# Altium PCB AHRS_board.PcbDoc
Units mm, origin at the board's own origin, x right, y up, seen from the top; angles counter-clockwise.
Board outline 46.25 x 39.2 mm, 2 copper layers (Top Layer, Bottom Layer); 5 components, 7 nets, 25 pads, 0 vias.
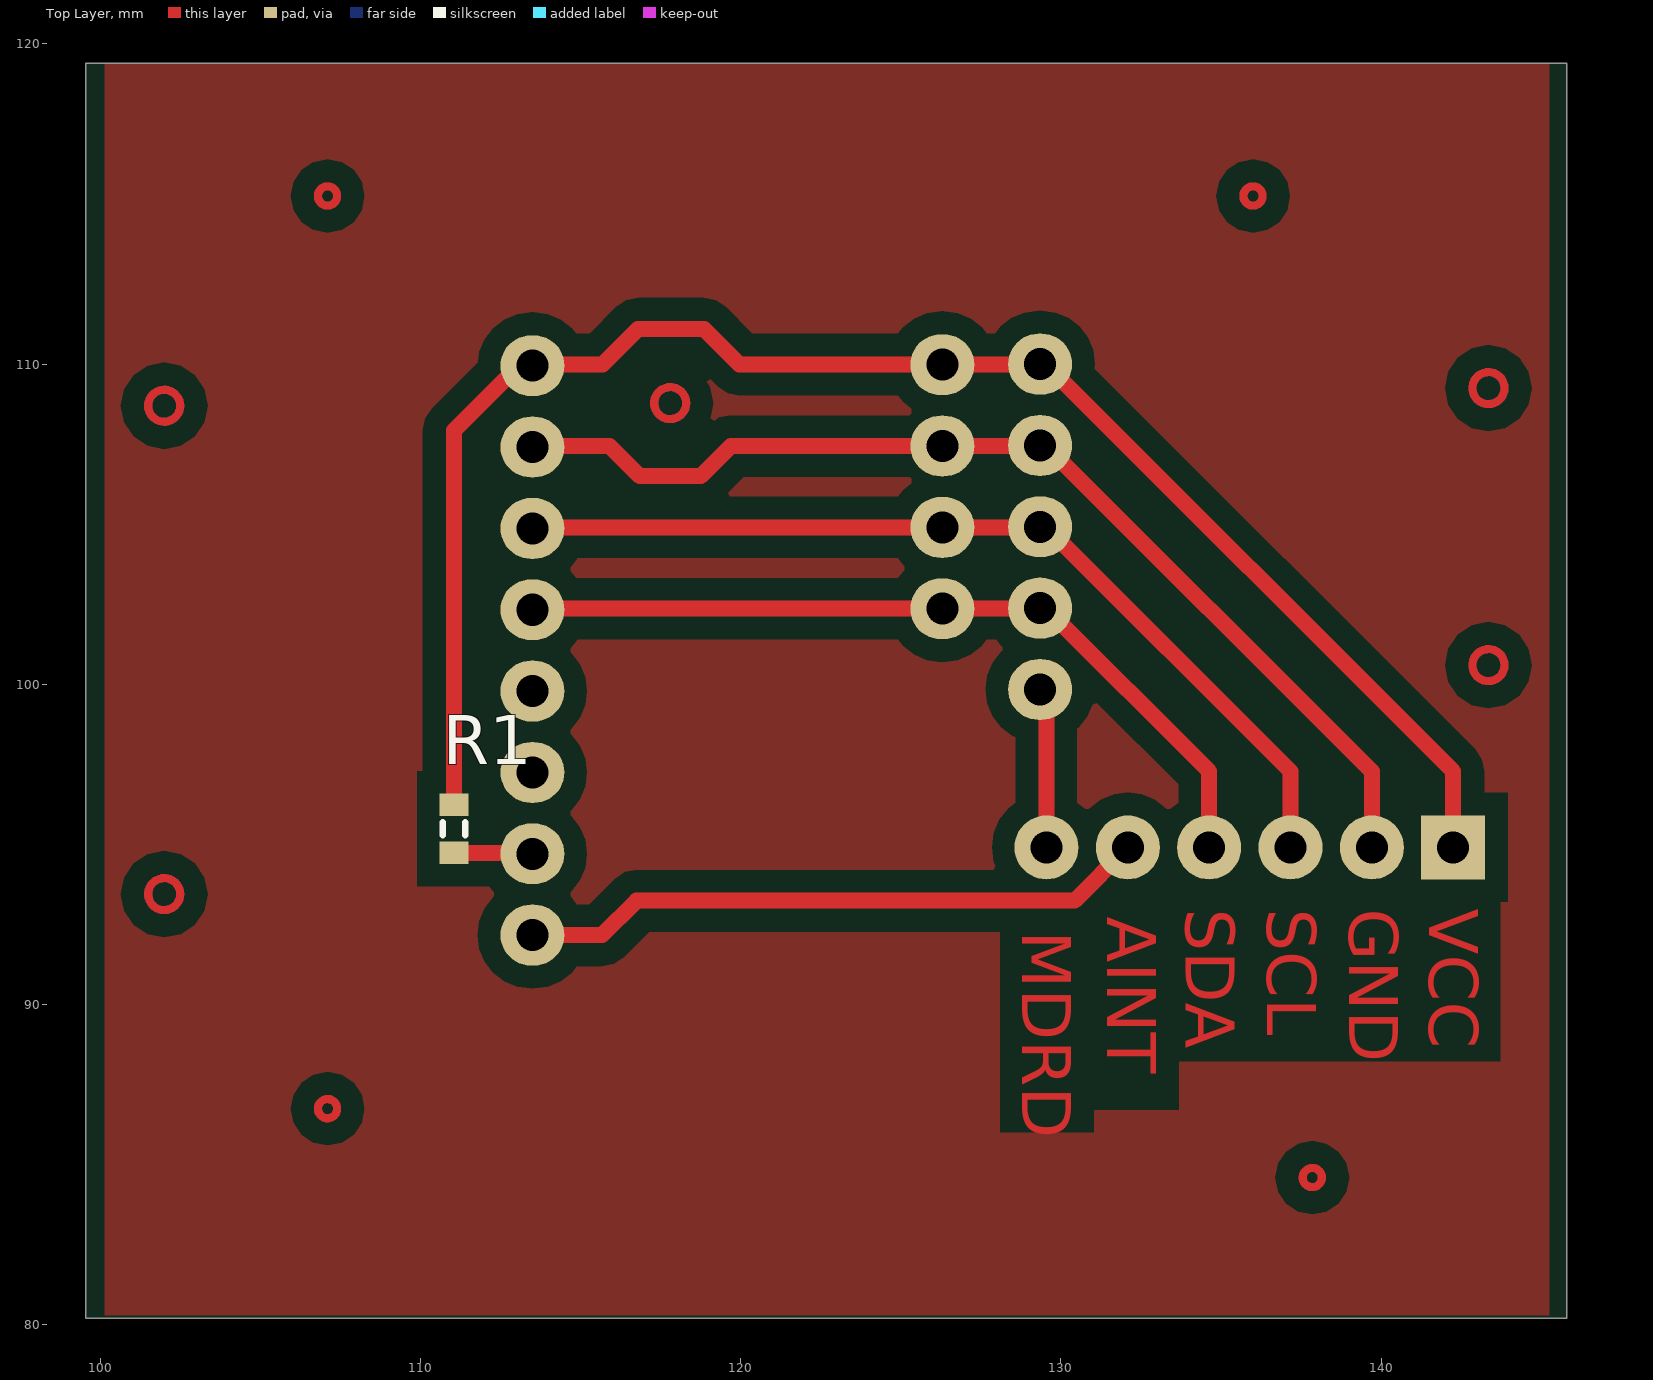
[diagram p0: Top Layer view]
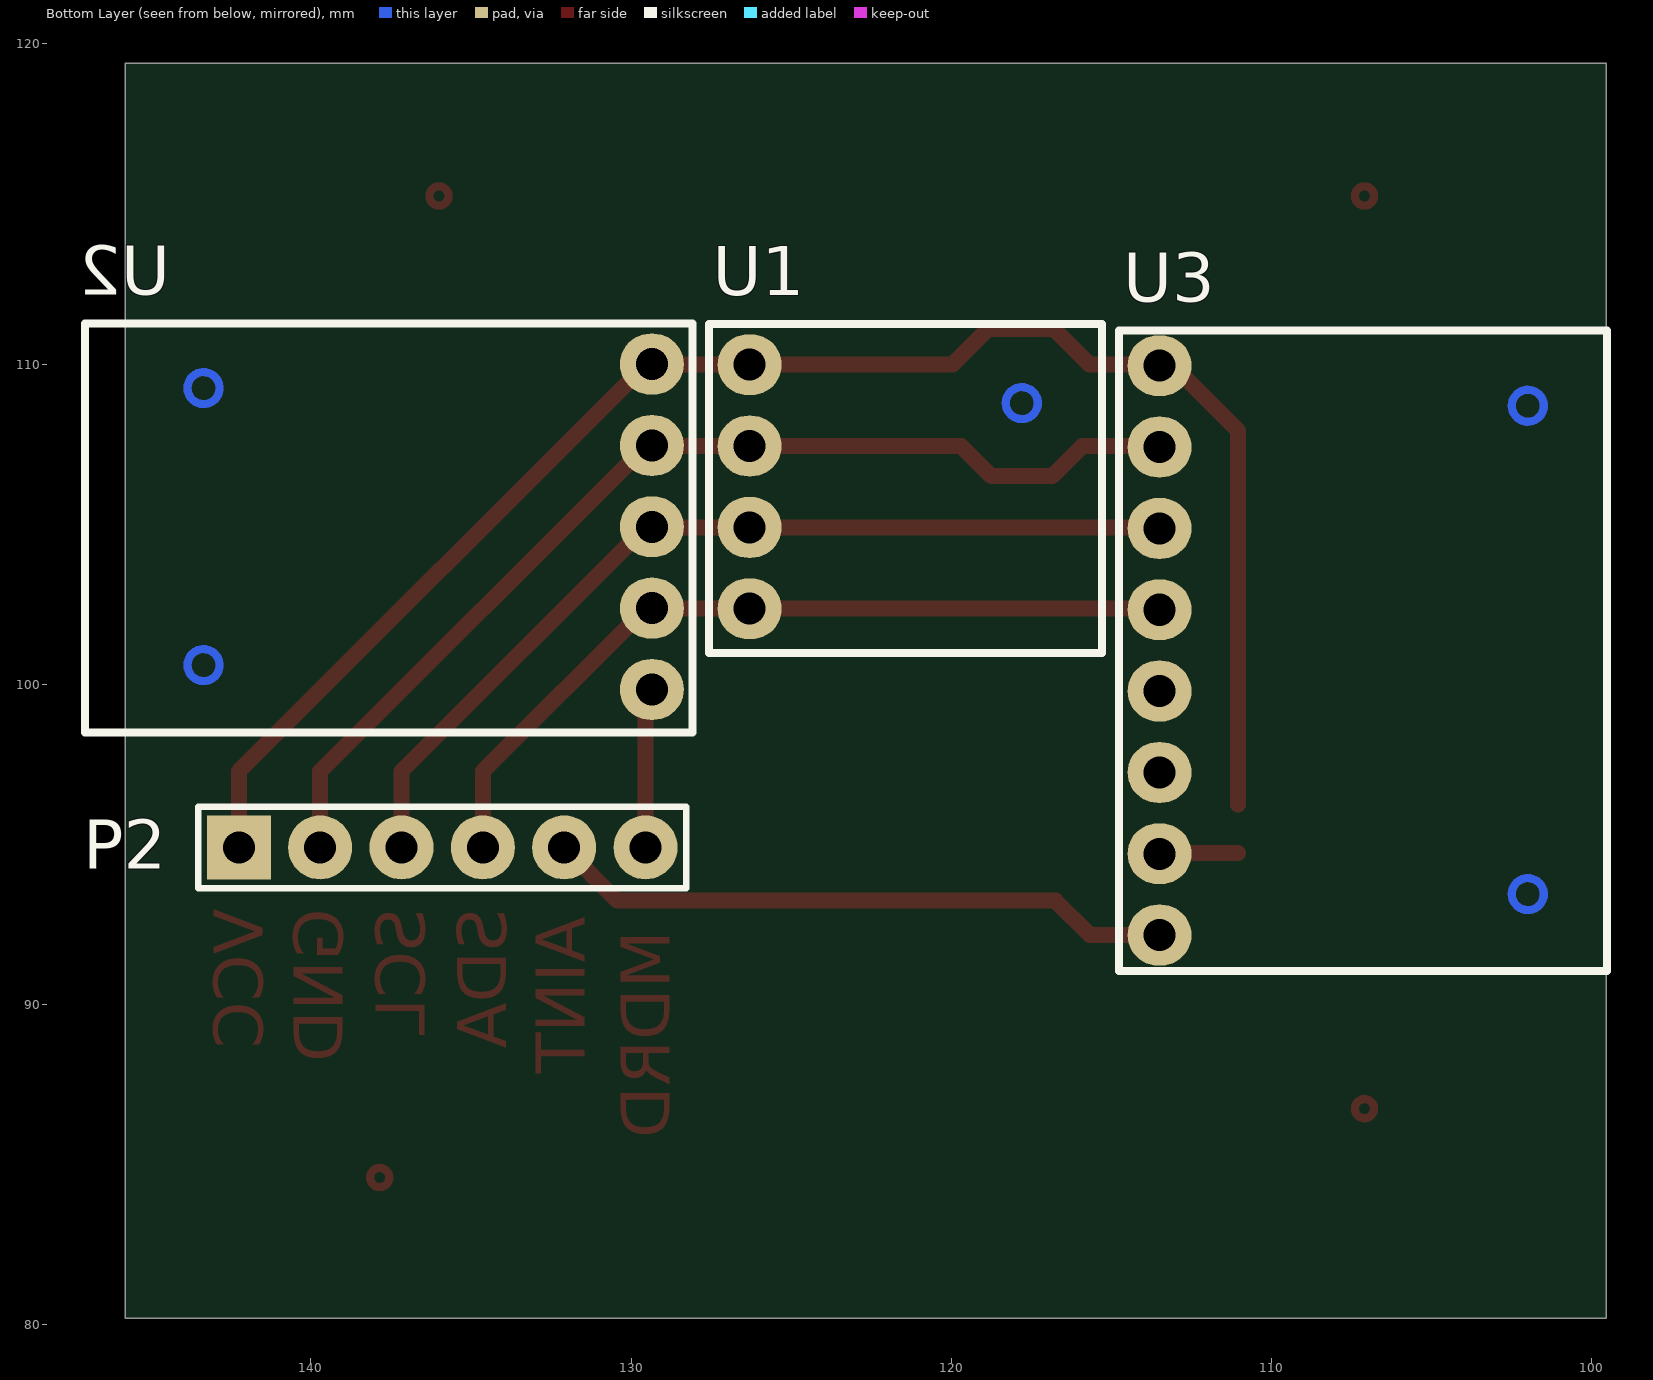
[diagram p1: Bottom Layer view, seen from below]

## Layer stack, top to bottom
Top Solder: solder mask 0.0102, Solder Resist, Dk 3.5
Top Layer: signal copper 0.0356
Dielectric 1: dielectric 0.32, FR-4, Dk 4.8
Bottom Layer: signal copper 0.0356
Bottom Solder: solder mask 0.0102, Solder Resist, Dk 3.5

## Board outline
99.55,80.2 99.55,119.4 145.8,119.4 145.8,80.2

## Design rules (kind name [scope] priority, off if disabled: settings)
Clearance [All] p1: gap=0.4 except(0.7: Arc-Poly Track-Poly SMDPad-Poly THPad-Poly Via-Poly Fill-Poly Poly-Poly)
PlaneConnect [All] p1: planeconnectstyle=Relief reliefexpansion=0.508 reliefentries=4 reliefconductorwidth=0.7 reliefairgap=0.4
PolygonConnect [All] p1: connectstyle=Relief reliefconductorwidth=0.7 reliefentries=4 polygonreliefangle="90 Angle" airgapwidth=0.4
RoutingVias [All] p1: holewidth=0.711 width=1.27 viastyle="Through Hole" minholewidth=0.711 minwidth=1.27 maxholewidth=0.711 maxwidth=1.27
SolderMaskExpansion [All] p1: expansion=0.102
Width [All] p1: maxlimit=0.5 minlimit=0.254 preferedwidth=0.254
29 further rules are at their usual default settings.

## Components (designator, comment, footprint, x,y, rotation, side; value= is the part's Value field where it differs from the comment)
P2 "Header 6" HDR1X6 142.25,94.91 r180 bottom
R1 "Res3" J1-0603 111.05,95.492 r270 top
U1 "BMP180 / GY-68" BMP180 126.3,109.982 r180 bottom
U2 "HMC5883L / GY-273" HMC5883L 129.35,110 r0 bottom
U3 "MPU6050 / GY-521" MPU6050 113.5,109.95 r180 bottom

## Footprints (in the part's own frame and the unit in brackets; to place one, negate y for a bottom-side part, rotate by r counter-clockwise, add the part's x,y. Pads: shape width x height; smd on the part's side, far side on the other; paste and mask are expansions set on the pad)
BMP180 [mm]
  oval 2x1.9 hole 1: 1(0,0) 2(0,-2.54) 3(0,-5.08) 4(0,-7.62)
  Multi-Layer circle w0.254: c8.5,-1.2 r0.5
  silkscreen extent -1.27,-9 11,1.27
HDR1X6 [mm] "Connector; Header; 6 Position"
  rect 2x2 hole 1: 1(0,0)
  round 2 hole 1: 2(2.54,0) 3(5.08,0) 4(7.62,0) 5(10.16,0) 6(12.7,0)
  silkscreen extent -1.27,-1.27 13.97,1.27
HMC5883L [mm]
  oval 2x1.9 hole 1: 1(0,0) 2(0,2.54) 3(0,5.08) 4(0,7.62) 5(0,10.16)
  Multi-Layer circle w0.254: c14,9.4 r0.5
  Multi-Layer circle w0.254: c14,0.75 r0.5
  silkscreen extent -1.27,-1.27 17.7,11.5
J1-0603 [mm] "Chip Resistor, Body 1.6x0.8mm, IPC High Density"
  rect 0.7x0.9 smd: 1(-0.75,0) 2(0.75,0)
  silkscreen extent -0.2,-0.35 0.2,0.35, body extent -0.85,-0.48 0.85,0.48, height 0.9
MPU6050 [mm]
  oval 2x1.9 hole 1: 1(0,0) 2(0,-2.54) 3(0,-5.08) 4(0,-7.62) 5(0,-10.16) 6(0,-12.7) 7(0,-15.24) 8(0,-17.78)
  Multi-Layer circle w0.254: c11.5,-16.5 r0.5
  Multi-Layer circle w0.254: c11.5,-1.25 r0.5
  silkscreen extent -1.27,-18.9 13.97,1.1

## Part data
P2: "Header, 6-Pin"
R1: "Resistor"

## Nets (pads, with @x,y where several pads share a name; then routed paths per layer and width w, separated by ;. In a path a pad name is that pad's centre, name@x,y a point inside that pad or via, vN(x,y) a via of type N, cw(c..) or ccw(c..) an arc to the next point about the centre after c; other vN are vias at no path point)
AINT: P2.5 U3.8 | length 19.8
  Top Layer w0.5: U3.8@113.45,92.17 115.67,92.17 116.75,93.25 130.43,93.25 P2.5
GND: P2.2 U1.2 U2.2 U3.2 | length 34
  Top Layer w0.5: U3.2@113.1,107.442 115.908,107.442 116.85,106.5 118.75,106.5 119.692,107.442 129.55,107.442 139.71,97.282 P2.2
MDRDY: P2.6 U2.5 | length 4.9
  Top Layer w0.5: P2.6 U2.5@129.55,99.822
NetR1_2: R1.2 U3.7 | length 2
  Top Layer w0.5: R1.2 U3.7@113.1,94.742
SCL: P2.3 U1.3 U2.3 U3.3 | length 29.6
  Top Layer w0.5: U3.3@113.1,104.902 129.55,104.902 137.17,97.282 P2.3
SDA: P2.4 U1.4 U2.4 U3.4 | length 26
  Top Layer w0.5: U3.4@113.1,102.362 129.55,102.362 134.63,97.282 P2.4
VCC: P2.1 R1.1 U1.1 U2.1 U3.1 | length 52.3
  Top Layer w0.5: R1.1 111.05,107.932 113.068,109.95 113.45,109.95 113.482,109.982 115.682,109.982 116.8,111.1 118.85,111.1 119.968,109.982 129.55,109.982 142.25,97.282 P2.1
pads on no net: U3.5 U3.6
copper on no net: | length 7.5
  Top Layer w0.254: 107.4,86.75 ccw(c107.1,86.75) 107.4,86.75 ; 107.4,115.25 ccw(c107.1,115.25) 107.4,115.25 ; 136.3,115.25 ccw(c136,115.25) 136.3,115.25 ; 138.15,84.6 ccw(c137.85,84.6) 138.15,84.6

## Polygon pours and split planes (outlines as drawn)
GND on Top Layer "Bottom Layer-No Net" (solid, pour order 0): 100.15,119.4 145.25,119.4 145.25,80.3 100.15,80.3

## Other copper
Top Layer:
  text "SDA" at 133.9,93 h1.52 r270
  text "SCL" at 136.45,93 h1.52 r270
  text "GND" at 139,93 h1.52 r270
  text "VCC" at 141.5,93 h1.52 r270
  text "AINT" at 131.45,92.75 h1.52 r270
  text "MDRD" at 128.8,92.3 h1.52 r270

## Silkscreen, mask and mechanical layers (free items; w line width, h text height)
Mechanical 1:
  lines w0.254: 100.15,80.2 145.25,80.2 145.25,119.4 100.15,119.4 100.15,80.2
Mechanical 13:
  circle w0.254: c107.1,86.75 r6.5
  circle w0.254: c137.85,84.6 r6.5
  circle w0.254: c107.1,115.25 r6.5
  circle w0.254: c136,115.25 r6.5